# Altium PCB 4ch GRT reader v7.PCBDOC
Units mil, origin at the board's own origin, x right, y up, seen from the top; angles counter-clockwise.
Board outline 2650 x 4500 mil, 4 copper layers (Top Layer, InternalPlane1, InternalPlane2, Bottom Layer); 74 components, 102 nets, 369 pads, 10 vias.
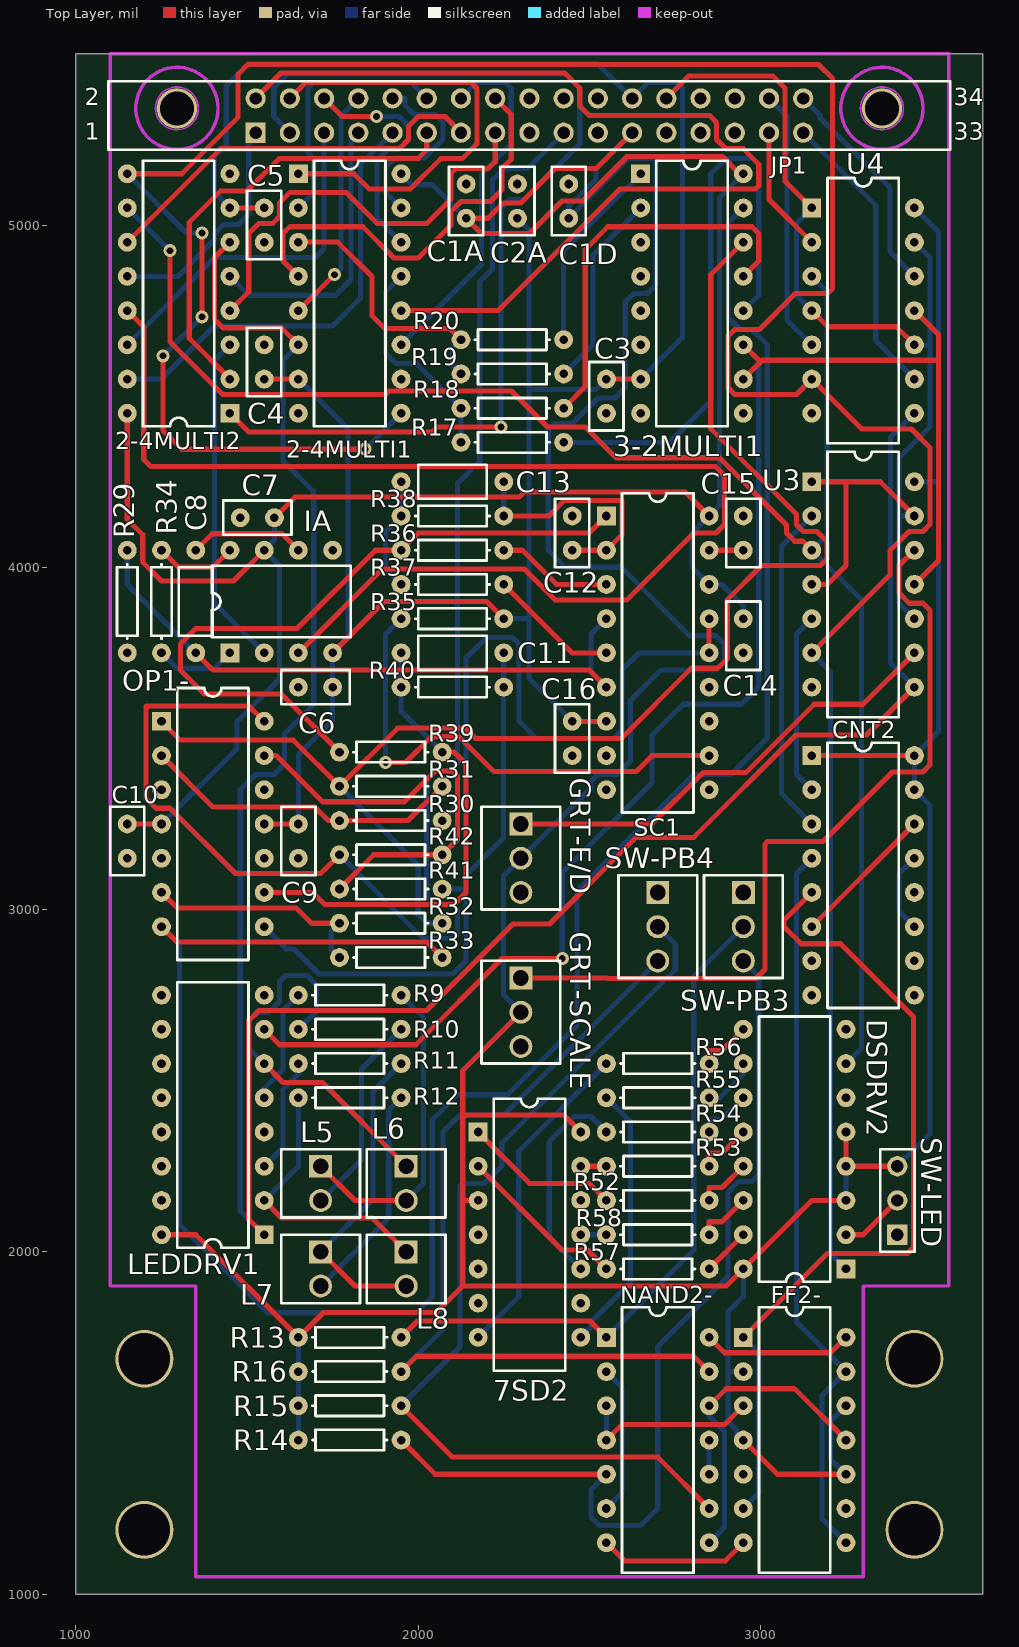
[diagram p0: Top Layer view]
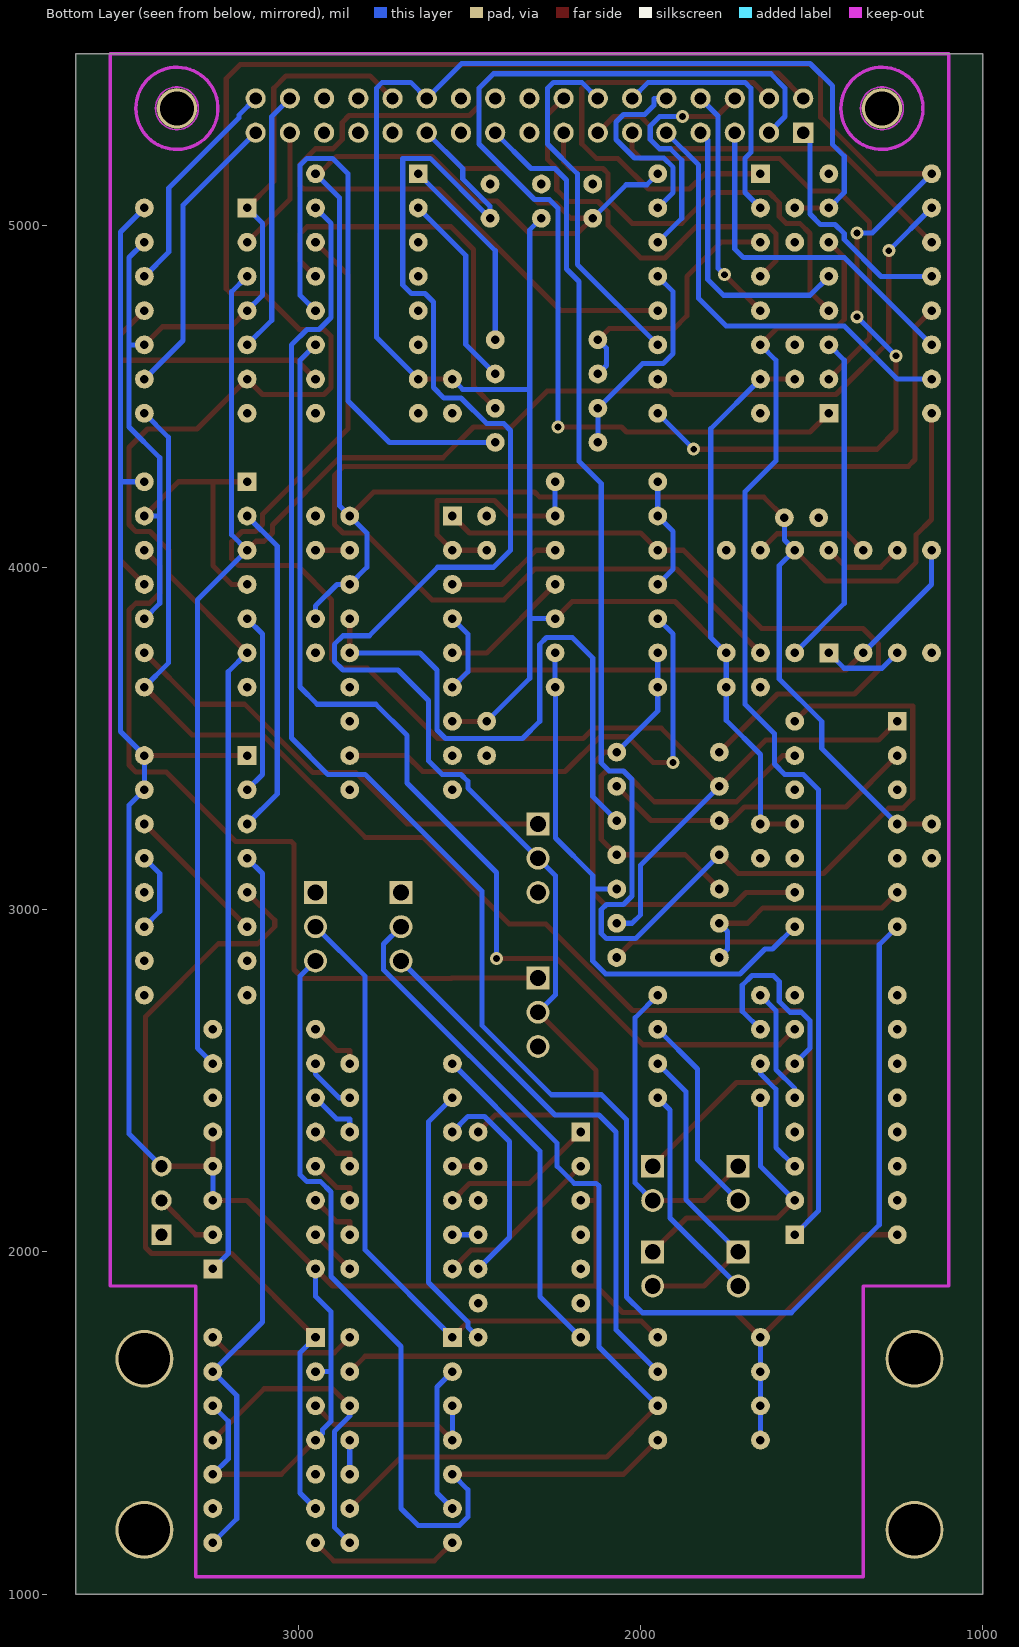
[diagram p1: Bottom Layer view, seen from below]
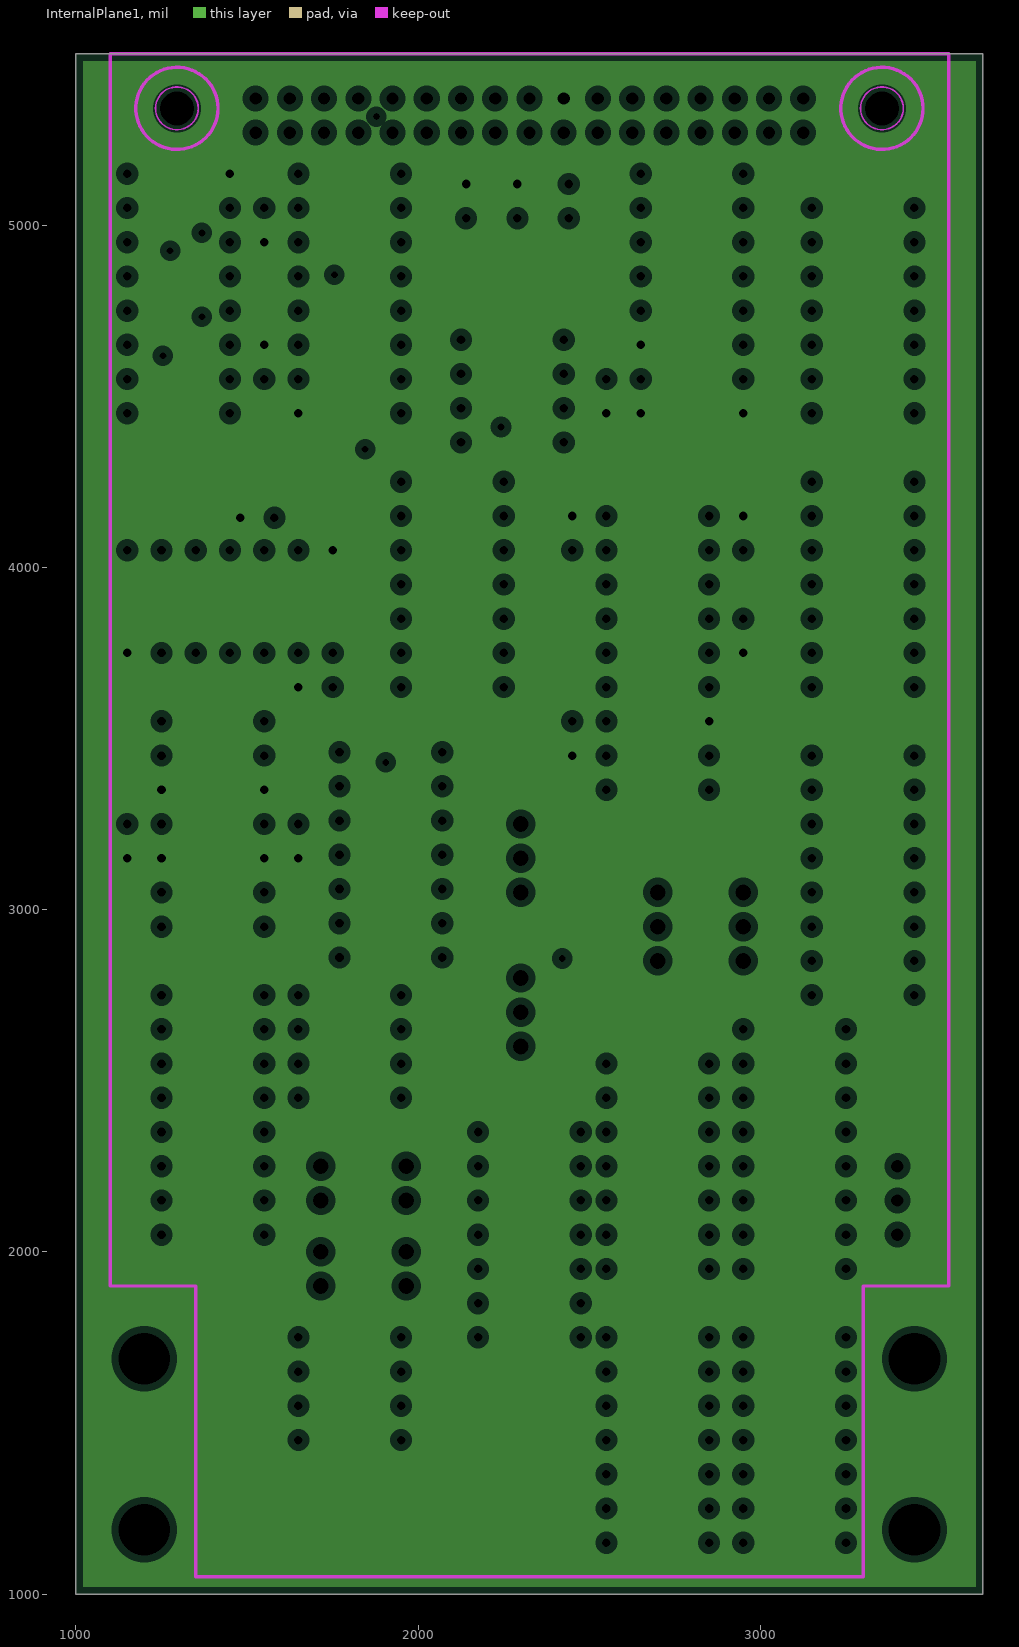
[diagram p2: InternalPlane1, clearances drawn from the general rule]
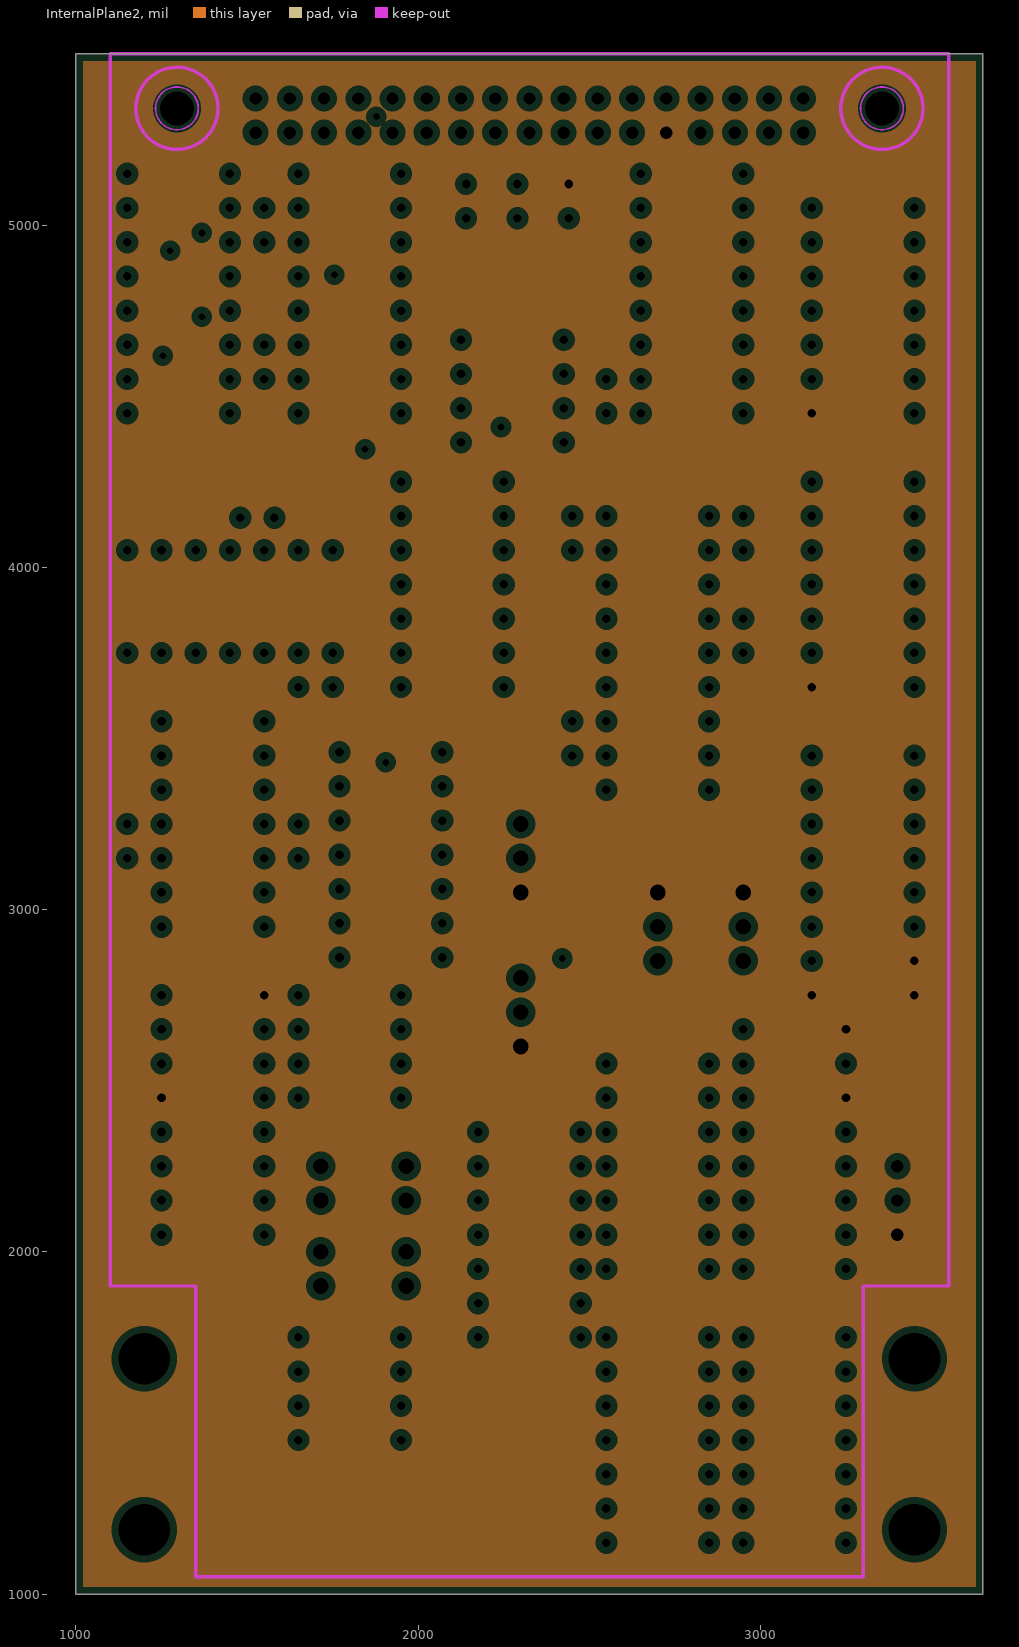
[diagram p3: InternalPlane2, clearances drawn from the general rule]

## Layer stack, top to bottom
Top Layer: signal copper 1.4
Dielectric: core 12.6, FR-4, Dk 4.8
InternalPlane1: plane copper 1.4, net AGD
Dielectric: prepreg 12.6, FR-4, Dk 4.8
InternalPlane2: plane copper 1.4, net DGD
Dielectric: core 12.6, FR-4, Dk 4.8
Bottom Layer: signal copper 1.4

## Board outline
1000,1000 1000,5500 3650,5500 3650,1000

## Design rules (kind name [scope] priority, off if disabled: settings)
Clearance [All] p1: gap=10
ComponentClearance [All] p1: gap=10 collisioncheckmode=0
HoleSize [All] p1: absolutevalues=TRUE maxlimit=200 minlimit=1 maxpercent=80.000 minpercent=20.000
PlaneClearance [All] p1: clearance=20
PlaneConnect [All] p1: planeconnectstyle=Relief reliefexpansion=20 reliefentries=4 reliefconductorwidth=10 reliefairgap=10
PolygonConnect [All] p1: connectstyle=Relief reliefconductorwidth=10 reliefentries=4 polygonreliefangle="90 Angle"
RoutingLayers [All] p1: top layer=Horizontal bottom layer=Vertical
RoutingVias [All] p1: holewidth=20 width=38 viastyle="Through Hole" minholewidth=20 minwidth=38 maxholewidth=20 maxwidth=38
SolderMaskExpansion [All] p1: expansion=4
TestPointUsage [All] p1: valid=0 allowmultiple=FALSE
Testpoint [All] p1: side=15 testpointundercomponent=TRUE minsize=40 maxsize=100 preferedsize=60 minholesize=0 maxholesize=40 preferedholesize=32 testpointgrid=1 style=1023 order=-539222988
Width [All] p1: maxlimit=30 minlimit=15 preferedwidth=10 toplayer_prefwidth=15 bottomlayer_prefwidth=15 minimp=50.000000 maximp=50.000000 favimp=50.000000
13 further rules are at their usual default settings.

## Components (designator, comment, footprint, x,y, rotation, side; value= is the part's Value field where it differs from the comment)
2-4MULTI1 "MC74HC4052N" DIP-16/X1.5 1800,4800 r270 top
2-4MULTI2 "MC74HC4052N" DIP-16/X1.5 1300,4800 r90 top
3-2MULTI1 "MC74HC4053N" DIP-16/X1.5 2800,4800 r270 top
7SD2 "LED-5082-7650" DIP-14 2325,2050 r270 top
C1A "1uF" RAD-0.1#1 2140,5120 r270 top (schematic designator C36)
C1D "Comment" RAD-0.1#1 2440,5020 r90 top
C2A "1uF" RAD-0.1#1 2290,5020 r90 top (schematic designator C37)
C3 ".1uF" RAD-0.1#1 2550,4550 r270 top (schematic designator C20)
C4 ".1uF" RAD-0.1#1 1550,4650 r270 top (schematic designator C28)
C5 ".1uF" RAD-0.1#1 1550,4950 r90 top (schematic designator C31)
C6 ".1uF" RAD-0.1#1 1750,3650 r180 top (schematic designator C34)
C7 ".1uF" RAD-0.1#1 1480,4145 r0 top (schematic designator C33)
C8 "33uF" RAD-0.1#2 1350,3850 r90 top
C9 ".1uF" RAD-0.1#1 1650,3150 r90 top (schematic designator C26)
C10 ".1uF" RAD-0.1#1 1150,3250 r270 top (schematic designator C25)
C11 "30uF" RAD-0.1#2 2050,3750 r0 top (schematic designator C4)
C12 "1uF" RAD-0.1#1 2450,4150 r270 top (schematic designator C2)
C13 ".47uF" RAD-0.1#2 2050,4250 r0 top (schematic designator C3)
C14 "in IC socket - GND to pin9" RAD-0.1#1 2950,3750 r90 top (schematic designator C1)
C15 ".1uF" RAD-0.1#1 2950,4150 r270 top (schematic designator C1)
C16 ".1uF" RAD-0.1#1 2450,3450 r90 top (schematic designator C23)
CNT2 "SN74193N" DIP-16/X1.5 3300,3100 r270 top
DSDRV2 "SN7447AN" DIP-16/X1.5 3100,2300 r90 top
FF2- "SN7474N" DIP-14/D19.7 3100,1450 r270 top
GRT-E/D "SW-SPDT" "Bulky Header 3" 2300,3250 r270 top
GRT-SCALE "SW-SPDT" "Bulky Header 3" 2300,2800 r270 top
IA "INA114AP" DIP-8 1600,3900 r0 top
JP1 "MHDR2X17" "Header 34 with Holes" 1525,5270 r0 top
L5 "LED2" BHDR1X2 1600,2300 r0 top
L6 "LED2" BHDR1X2 1850,2300 r0 top
L7 "LED2" BHDR1X2 1600,2050 r0 top
L8 "LED2" BHDR1X2 1850,2050 r0 top
LEDDRV1 "AM26LS31CN" DIP-16/X1.5 1400,2400 r90 top
NAND2- "SN7400N" DIP-14/D19.7 2700,1450 r270 top
OP1- "OP484EP" DIP-14 1400,3250 r270 top
R9 "100" AXIAL-0.3 1800,2750 r0 top
R10 "100" AXIAL-0.3 1800,2650 r180 top
R11 "100" AXIAL-0.3 1800,2550 r0 top
R12 "100" AXIAL-0.3 1800,2450 r180 top
R13 "10K" AXIAL-0.3 1800,1750 r180 top
R14 "10K" AXIAL-0.3 1800,1450 r0 top
R15 "10K" AXIAL-0.3 1800,1550 r180 top
R16 "10K" AXIAL-0.3 1800,1650 r0 top
R17 "1M" AXIAL-0.3 2275,4365 r180 top
R18 "100K" AXIAL-0.3 2275,4465 r180 top
R19 "1M" AXIAL-0.3 2275,4565 r180 top
R20 "100K" AXIAL-0.3 2275,4665 r180 top
R29 "5K" AXIAL-0.3 1150,3900 r270 top
R30 "1K" AXIAL-0.3 1920,3260 r180 top
R31 "750" AXIAL-0.3 1920,3360 r180 top
R32 "10K" AXIAL-0.3 1920,2960 r180 top
R33 "10K" AXIAL-0.3 1920,2860 r0 top
R34 "100" AXIAL-0.3 1250,3900 r270 top
R35 "47K" AXIAL-0.3 2100,3850 r0 top
R36 "10K" AXIAL-0.3 2100,4050 r180 top
R37 "1K" AXIAL-0.3 2100,3950 r180 top
R38 "4.7K" AXIAL-0.3 2100,4150 r0 top
R39 "10K" AXIAL-0.3 1920,3460 r180 top
R40 "50K" AXIAL-0.3 2100,3650 r180 top
R41 "10K" AXIAL-0.3 1920,3060 r0 top
R42 "10K" AXIAL-0.3 1920,3160 r0 top
R52 "1000" AXIAL-0.3 2700,2150 r180 top
R53 "1000" AXIAL-0.3 2700,2250 r180 top
R54 "1000" AXIAL-0.3 2700,2350 r180 top
R55 "1000" AXIAL-0.3 2700,2450 r180 top
R56 "1000" AXIAL-0.3 2700,2550 r180 top
R57 "1000" AXIAL-0.3 2700,1950 r180 top
R58 "1000" AXIAL-0.3 2700,2050 r180 top
SC1 "NE5521" DIP-18 2700,3750 r270 top
SW-LED "Comment" HDR1X3 3400,2050 r90 top
SW-PB3 "SW-SPDT" "Bulky Header 3" 2950,3050 r270 top
SW-PB4 "SW-SPDT" "Bulky Header 3" 2700,3050 r270 top
U3 "SN74LS125AN" DIP-14/D19.7 3300,3950 r270 top
U4 "SN74LS126AN" DIP-14/D19.7 3300,4750 r270 top

## Footprints (in the part's own frame and the unit in brackets; to place one, negate y for a bottom-side part, rotate by r counter-clockwise, add the part's x,y. Pads: shape width x height; smd on the part's side, far side on the other; paste and mask are expansions set on the pad)
AXIAL-0.3 [mil]
  round 55 hole 25: 1(-150,0) 2(150,0)
  silkscreen extent -109,-30 109,30
BHDR1X2 [mil] "Header, 2 Pin"
  rect 67x67 hole 46: 1(115,-50)
  round 67 hole 46: 2(115,-150)
  silkscreen extent 0,-200 230,0
"Bulky Header 3" [mil] "3-pin header, bulky"
  rect 67x67 hole 46: 1(0,0)
  round 67 hole 46: 2(100,0) 3(200,0)
  silkscreen extent -50,-115 250,115
DIP-8 [mil]
  rect 55x55 hole 25: 1(-150,-150)
  round 55 hole 25: 2(-50,-150) 3(50,-150) 4(150,-150) 5(150,150) 6(50,150) 7(-50,150) 8(-150,150)
  silkscreen extent -203,-104 203,104
DIP-14 [mil]
  rect 55x55 hole 25: 1(-300,-150)
  round 55 hole 25: 2(-200,-150) 3(-100,-150) 4(0,-150) 5(100,-150) 6(200,-150) 7(300,-150) 8(300,150) 9(200,150) 10(100,150) 11(0,150) 12(-100,150) 13(-200,150) 14(-300,150)
  silkscreen extent -398,-104 398,104
DIP-14/D19.7 [mil]
  rect 55x55 hole 25: 1(-300,-150)
  round 55 hole 25: 2(-200,-150) 3(-100,-150) 4(0,-150) 5(100,-150) 6(200,-150) 7(300,-150) 8(300,150) 9(200,150) 10(100,150) 11(0,150) 12(-100,150) 13(-200,150) 14(-300,150)
  silkscreen extent -388,-104 388,104
DIP-16/X1.5 [mil]
  rect 55x55 hole 25: 1(-350,-150)
  round 55 hole 25: 2(-250,-150) 3(-150,-150) 4(-50,-150) 5(50,-150) 6(150,-150) 7(250,-150) 8(350,-150) 9(350,150) 10(250,150) 11(150,150) 12(50,150) 13(-50,150) 14(-150,150) 15(-250,150) 16(-350,150)
  silkscreen extent -388,-104 388,104
DIP-18 [mil]
  rect 55x55 hole 25: 1(-400,-150)
  round 55 hole 25: 2(-300,-150) 3(-200,-150) 4(-100,-150) 5(0,-150) 6(100,-150) 7(200,-150) 8(300,-150) 9(400,-150) 10(400,150) 11(300,150) 12(200,150) 13(100,150) 14(0,150) 15(-100,150) 16(-200,150) 17(-300,150) 18(-400,150)
  silkscreen extent -467,-104 467,104
HDR1X3 [mil]
  rect 59x59 hole 36: 1(0,0)
  round 59 hole 36: 2(100,0) 3(200,0)
  silkscreen extent -50,-50 250,50
"Header 34 with Holes" [mil] "34-pin DIP header with holes"
  rect 59x59 hole 36: 1(0,0)
  round 59 hole 36: 2(0,100) 3(100,0) 4(100,100) 5(200,0) 6(200,100) 7(300,0) 8(300,100) 9(400,0) 10(400,100) 11(500,0) 12(500,100) 13(600,0) 14(600,100) 15(700,0) 16(700,100) 17(800,0) 18(800,100) 19(900,0) 20(900,100) 21(1000,0) 22(1000,100) 23(1100,0) 24(1100,100) 25(1200,0) 26(1200,100) 27(1300,0) 28(1300,100) 29(1400,0) 30(1400,100) 31(1500,0) 32(1500,100) 33(1600,0) 34(1600,100)
  round 118 hole 100: ""(-230,71) ""(1830,71)
  Keep-Out Layer circle w10: c1830,71 r120
  Keep-Out Layer circle w10: c-230,71 r120
  Keep-Out Layer circle w5: c1830,71 r62.5
  Keep-Out Layer circle w5: c-230,71 r62.5
  silkscreen extent -430,-50 2030,150
RAD-0.1#1 [mil]
  round 55 hole 25: 1(0,0) 2(100,0)
  silkscreen extent -50,-50 150,50
RAD-0.1#2 [mil]
  round 55 hole 25: 1(-100,0) 2(200,0)
  silkscreen extent -50,-50 150,50

## Part data
2-4MULTI1 2-4MULTI2: "Dual 4-Channel Analog Multiplexer/Demultiplexer"
3-2MULTI1: "Analog Multiplexer/Demultiplexer"
C1A C2A C3 C4 C5 C6 C7 C8 C9 C10 C11 C12 C13 C14 C15 C16: library part Cap, "Capacitor"
CNT2: "Synchronous 4-Bit Up/Down Counter (Dual Clock with Clear)"
DSDRV2: "BCD-to-Seven-Segment Decoder/Driver"
FF2-: "Dual D-Type Positive-Edge-Triggered Flip-Flop with Preset and Clear"
GRT-E/D GRT-SCALE SW-PB3 SW-PB4: "Single-Pole, Double-Throw Switch"
IA: "Precision Instrumentation Amplifier"
JP1: "Header, 17-Pin, Dual row"
L5 L6 L7 L8: "Typical RED, GREEN, YELLOW, AMBER GaAs LED"
LEDDRV1: "Quadruple Differential Line Driver"
NAND2-: "Quadruple 2-Input Positive-NAND Gate"
OP1-: "Precision Rail-to-Rail Input and Output Operational Amplifier"
R9 R10 R11 R12 R13 R14 R15 R16 R17 R18 R19 R20 R29 R30 R31 R32 R33 R34 R35 R36 R37 R38 R39 R40 R41 R42 R52 R53 R54 R55 R56 R57 R58: library part Res1, "Resistor"
U3 U4: "Quadruple Bus Buffer with 3-State Outputs"

## Free pads (board coordinates)
  round 169 hole 151: 1(1200,1187.5) 2(1200,1687.5) 3(3450,1187.5) 4(3450,1687.5)

## Via types
v1: diameter 38, hole 20, Top Layer to Bottom Layer, 10 vias

## Nets (pads, with @x,y where several pads share a name; then routed paths per layer and width w, separated by ;. In a path a pad name is that pad's centre, name@x,y a point inside that pad or via, vN(x,y) a via of type N, cw(c..) or ccw(c..) an arc to the next point about the centre after c; other vN are vias at no path point)
+5AV: 2-4MULTI1.16 2-4MULTI2.16 3-2MULTI1.16 C1A.2 C7.2 C10.1 C14.2 IA.7 JP1.23 OP1-.4 SC1.16 SC1.18 | length 6578.1
  Top Layer w15: C10.1 OP1-.4 ; 2-4MULTI2.16 1150,4140 1195,4095 1195,4015 1250,3960 1460,3960 IA.7 ; C7.2 1640,4205 2295,4205 2310,4220 2780,4220 SC1.18 ; JP1.23 2520,5165 2400,5165 2300,5065 2249,5065 2204,5020 C1A.2 2185,4975 2325,4975 2420,5070 2480,5070 2610,5200 2889.2,5200 3-2MULTI1.16@2939.2,5150
  Bottom Layer w15: OP1-.4 1471,3471 1471,3550 1595,3674 1595,4005 IA.7 1580,4080 C7.2 ; 2-4MULTI1.16 1982,5118 2042,5118 C1A.2 ; C14.2 2950,3887.5 2887.5,3950 SC1.16 2800,4000 2800,4100 SC1.18 2880,4180 2880,5080 3-2MULTI1.16
+5DV: 7SD2.3 7SD2.14 C1D.1 CNT2.1 CNT2.15 CNT2.16 DSDRV2.3 DSDRV2.4 DSDRV2.5 DSDRV2.16 FF2-.2 FF2-.4 FF2-.10 FF2-.12 GRT-E/D.2 GRT-SCALE.2 LEDDRV1.16 R13.2 R14.1 R15.2 R16.1 SW-LED.3 U3.14 U4.14 | length 12802.9
  Top Layer w15: LEDDRV1.16 1350,2050 R13.2 1723,1823 2053,1823 2130,1900 ; 2130,2150 7SD2.3 ; 2130,2390 2140,2400 2425,2400 7SD2.14 ; GRT-SCALE.2 2130,2530 2130,1900 ; FF2-.4 3050,1350 FF2-.10 ; CNT2.1 CNT2.16 ; DSDRV2.3 3150,2150 DSDRV2.16 2900,1900 2130,1900 ; DSDRV2.5 DSDRV2.4 SW-LED.3
  Bottom Layer w15: R14.1 R15.2 R16.1 R13.2 ; GRT-SCALE.2 2249,2751 2249,3099 GRT-E/D.2 2505,3355 2505,3375 2525,3395 2580,3395 2620,3435 2620,3611 2709,3700 2870,3700 2895,3725 2895,3775 2870,3800 2793,3800 2593,4000 2430,4000 2380,4050 2380,4400 2400,4420 2450,4420 2525,4495 2575,4495 2605,4525 2605,4775 2630,4800 2670,4800 2695,4825 2695,5195 2615,5195 C1D.1 2440,5055 2520,5135 2520,5165 2625,5270 ; FF2-.4 2930,1470 2930,1480 2905,1505 2905,1650 ; FF2-.2 2905,1650 ; DSDRV2.16 2950,1870 2905,1825 2905,1650 ; FF2-.10 3205,1395 3205,1505 FF2-.12 ; DSDRV2.3 DSDRV2.4 ; SW-LED.3 3495,2345 3495,3305 CNT2.15 CNT2.16 3520,3520 3520,4250 ; U3.14 3520,4250 ; U4.14 3520,4980 3520,4250
-5V: 2-4MULTI1.7 2-4MULTI2.7 3-2MULTI1.7 C2A.1 C3.1 C4.2 C5.2 C6.1 C9.2 C16.2 IA.4 JP1.24 OP1-.11 R35.2 SC1.7 | length 7070
  Top Layer w15: 2-4MULTI2.7 C5.2 ; OP1-.11 C9.2 ; C4.2 2-4MULTI1.7 ; IA.4 1900,3900 2200,3900 R35.2 ; C16.2 SC1.7 ; C3.1 3-2MULTI1.7
  Bottom Layer w15: 2-4MULTI2.7 1405,5095 1405,5201 1439,5235 1439,5406 1505,5472 2523,5472 JP1.24 2672,5417 2755,5417 2772,5400 2772,4672 3-2MULTI1.7 ; C9.2 1650,3453 1750,3553 C6.1 IA.4 1795,3795 1795,4405 2-4MULTI1.7 ; R35.2 2324,3850 ; C2A.1 2324,4986 2324,4520 ; C16.2 2324,3676 2324,3850 ; C3.1 2520,4520 2324,4520 ; 2324,3850 2324,4520
AGD: 2-4MULTI1.8 2-4MULTI2.8 3-2MULTI1.6 3-2MULTI1.8 3-2MULTI1.9 C1A.1 C2A.2 C3.2 C4.1 C5.1 C6.2 C7.1 C9.1 C10.2 C12.1 C14.1 C15.1 C16.1 IA.5 JP1.20 OP1-.3 OP1-.5 OP1-.10 OP1-.12 R29.2 SC1.12
DGD: C1D.2 CNT2.8 CNT2.9 CNT2.10 DSDRV2.6 DSDRV2.8 GRT-E/D.3 GRT-SCALE.3 JP1.25 LEDDRV1.8 LEDDRV1.12 SW-LED.1 SW-PB3.1 SW-PB4.1 U3.7 U4.7
DIO0: JP1.31 U4.2 | length 371.8
  Top Layer w15: JP1.31 3025,5075 U4.2
DIO1: JP1.32 U4.5 | length 771.8
  Bottom Layer w15: JP1.32 3078,5317 3078,4722 U4.5
DIO2: JP1.33 U4.9 | length 854.6
  Bottom Layer w15: JP1.33 3337,5058 3337,4663 U4.9
DIO3: JP1.34 U4.12 | length 654.6
  Bottom Layer w15: JP1.34 3174,5321 3174,5313 3379,5108 3379,4921 U4.12
GND: FF2-.7 NAND2-.7 | length 443.9
  Top Layer w15: NAND2-.7 2603,1097 2897,1097 FF2-.7
"GRT OUT": JP1.19 OP1-.14 R42.1 | length 4403.1
  Top Layer w15: OP1-.14 1505,3595 1205,3595 1205,3325 1234,3296 1275,3296 1466,3105 1715,3105 R42.1
  Bottom Layer w15: R42.1 2015,2915 2100,2915 2115,2930 2115,3000 2100,3015 2050,3015 2025,3040 2025,3380 2050,3405 2092,3405 2115,3428 2115,4245 2180,4310 2180,4835 2217,4872 2217,5132 2250,5165 2320,5165 JP1.19
"L/R LINE": JP1.26 U3.1 U3.4 U3.10 U3.13 U4.1 U4.4 U4.10 U4.13 | length 3424
  Top Layer w15: JP1.26 2791,5436 3036,5436 3072,5400 3072,5128 U4.1 ; U3.4 3195,3950 3250,4005 3250,4250 ; U3.1 3250,4250 ; U4.4 3197,4703 3397,4703 U4.10 ; U3.13 3350,4250 3250,4250
  Bottom Layer w15: U4.4 3105,4795 3105,5005 U4.1 ; U3.10 3405,3895 3405,4150 ; U3.13 3405,4150 ; U4.10 3495,4650 ; U4.13 3495,4905 3495,4650 ; 3405,4150 3405,4320 3495,4410 3495,4650
Net2-4MULTI1_1: 2-4MULTI1.1 JP1.4 | length 1330.9
  Top Layer w15: JP1.4 1672,5417 2154,5417 2172,5399 2172,5237.5 2128.5,5194 2066,5194 1977,5105 1857,5105 1812,5150 2-4MULTI1.1
Net2-4MULTI1_2: 2-4MULTI1.2 JP1.12 | length 749.2
  Bottom Layer w15: 2-4MULTI1.2 1695,5095 1695,5195 1678,5212 1678,5400 1695,5417 1978,5417 JP1.12
Net2-4MULTI1_3: 2-4MULTI1.3 R19.2 R20.2 | length 781.1
  Top Layer w15: 2-4MULTI1.3 1765,4950 1865,4850 1865,4735 1902,4698 2092,4698 R20.2
  Bottom Layer w15: R19.2 2100,4590 2100,4640 R20.2
Net2-4MULTI1_4: 2-4MULTI1.4 JP1.16 | length 1233.1
  Top Layer w15: 2-4MULTI1.4 1605,4895 1605,4975 1625,4995 1838,4995 1929,4904 2000,4904 2095,4999 2095,5039 2125,5069 2211,5069 2245,5103 2245,5165 2272,5192 2272,5323 JP1.16
Net2-4MULTI1_5: 2-4MULTI1.5 JP1.8 | length 692.5
  Top Layer w15: 2-4MULTI1.5 v1(1755,4855)
  Bottom Layer w15: v1(1755,4855) 1774,4874 1774,5319 JP1.8
Net2-4MULTI1_6: 2-4MULTI1.6 2-4MULTI2.6 LEDDRV1.1 U3.8 U4.8 | length 7175.8
  Top Layer w15: 2-4MULTI2.6 1405,4905 1405,4725 1430,4700 1600,4700 2-4MULTI1.6 ; LEDDRV1.1 1505,2095 1505,2675 1535,2705 2024,2705 2277,2958 2384,2958 2637,3211 2805,3211 3104,3510 3310,3510 U3.8
  Bottom Layer w15: LEDDRV1.1 1480,2120 1480,3350 1525,3395 1579,3395 1609,3425 1609,3514 1695,3600 1695,4221 1605,4311 1605,4605 2-4MULTI1.6 ; U3.8 3380,3720 3380,4380 U4.8
Net2-4MULTI1_9: 2-4MULTI1.9 2-4MULTI2.9 DSDRV2.1 U3.6 U4.6 | length 8395.8
  Top Layer w15: 2-4MULTI2.9 1309,5150 1474,5315 1474,5441 1502,5469 3170,5469 3211,5428 3211,4814 3197,4800 3102,4800 2997,4695 2925,4695 2905,4675 2905,4525 2925,4505 3105,4505 U4.6 3296,4404 3441,4404 3495,4350 3495,4125 3475,4105 3434,4105 3379,4050 3379,3979 U3.6 ; v1(1254,4618) 1254,4400 1309,4345 v1(1845,4345) ; v1(1368,4732) v1(1368,4977)
  Bottom Layer w15: 2-4MULTI2.9 1323,4977 v1(1368,4977) ; v1(1254,4618) v1(1368,4732) ; v1(1845,4345) 2-4MULTI1.9 ; U3.6 3205,3695 3205,1995 DSDRV2.1
Net2-4MULTI1_10: 2-4MULTI1.10 2-4MULTI2.10 DSDRV2.7 U3.3 U4.3 | length 5043.4
  Top Layer w15: v1(1275,4925) 1275,4659 1429,4505 1905,4505 1915,4515 1950,4515 ; 2-4MULTI1.10 1950,4515 ; U3.3 3124,4076 3100,4076 3076,4100 3076,4124 2880,4320 2578,4320 2488,4410 2378,4410 2273,4515 1950,4515
  Bottom Layer w15: 2-4MULTI2.10 v1(1275,4925) ; U4.3 3195,4805 3195,4095 U3.3 3295,3905 3295,2595 DSDRV2.7
Net2-4MULTI1_11: 2-4MULTI1.11 JP1.14 | length 1056.9
  Bottom Layer w15: 2-4MULTI1.11 2185,4885 2185,5150 2272,5237 2272,5400 2255,5417 2172,5417 JP1.14
Net2-4MULTI1_12: 2-4MULTI1.12 JP1.2 | length 2929.8
  Top Layer w15: JP1.2 1599,5444 2428,5444 2472,5400 2472,5348 2500,5320 2852,5320 2872,5300 2872,5250 2899,5223 2950,5223 2995,5178 2995,5115 2985,5105 2589,5105 2234,4750 2-4MULTI1.12
Net2-4MULTI1_13: 2-4MULTI1.13 R17.2 R18.2 | length 629.9
  Bottom Layer w15: 2-4MULTI1.13 1905,4805 1905,4625 1935,4595 1995,4595 R18.2 R17.2
Net2-4MULTI1_14: 2-4MULTI1.14 JP1.6 | length 705.5
  Top Layer w15: JP1.6 1778,5317 v1(1878,5317)
  Bottom Layer w15: v1(1878,5317) 1944.47,5317 1972,5289.47 1972,5250 1945,5223 1913.36,5223 1880,5189.64 1880,5020 2-4MULTI1.14
Net2-4MULTI1_15: 2-4MULTI1.15 JP1.10 | length 576.3
  Bottom Layer w15: JP1.10 1961,5370 1961,5350 1988,5323 2050,5323 2072,5301 2072,5250 2018,5196 1932.36,5196 1905,5168.64 1905,5095 2-4MULTI1.15
Net2-4MULTI2_1: 2-4MULTI2.1 JP1.3 | length 3009.7
  Top Layer w15: 2-4MULTI2.1 1505,4395 2041,4395 2056,4410 v1(2242,4410)
  Bottom Layer w15: JP1.3 1578,5317 1578,5400 1620,5442 2430,5442 2472,5400 2472,5237 2310,5075 2267,5075 2242,5050 v1(2242,4410)
Net2-4MULTI2_2: 2-4MULTI2.2 JP1.11 | length 1339.1
  Top Layer w15: 2-4MULTI2.2 1331,4669 1331,5008 1423,5100 1500,5100 1595,5195 2000,5195 2025,5220 JP1.11
Net2-4MULTI2_3: 2-4MULTI2.3 IA.2 | length 978.7
  Bottom Layer w15: 2-4MULTI2.3 1405,4605 1405,3895 IA.2
Net2-4MULTI2_4: 2-4MULTI2.4 JP1.15 | length 1282.1
  Top Layer w15: 2-4MULTI2.4 1505,4805 1505,4975 1535,5005 1575,5005 1595,5025 1595,5065 1625,5095 1790,5095 1880,5005 2025.64,5005 2095,5074.36 2095,5150 2110,5165 2205,5165 2225,5185 JP1.15
Net2-4MULTI2_5: 2-4MULTI2.5 JP1.7 | length 833.5
  Bottom Layer w15: 2-4MULTI2.5 1505,4795 1758,4795 1804,4841 1804,5249 JP1.7
Net2-4MULTI2_11: 2-4MULTI2.11 JP1.13 | length 1169.3
  Top Layer w15: 2-4MULTI2.11 1423,5223 1945,5223 1972,5250 1972,5289 2000,5317 2078,5317 JP1.13
Net2-4MULTI2_12: 2-4MULTI2.12 JP1.1 | length 686.9
  Bottom Layer w15: 2-4MULTI2.12 1297.5,4850 1405,4957.5 1405,4975 1432,5002 1475,5002 1505,5032 1505,5250 JP1.1
Net2-4MULTI2_13: 2-4MULTI2.13 IA.3 | length 3789.2
  Top Layer w15: 2-4MULTI2.13 1198,4702 1198,4315 1218,4295 2868,4295 2895,4268 2895,4125 2870,4100 2805,4100 2610,3905 2400,3905 2310,3995 1895,3995 IA.3
Net2-4MULTI2_14: 2-4MULTI2.14 JP1.5 | length 1031
  Bottom Layer w15: 2-4MULTI2.14 1405,4905 1700,4905 1725,4930 JP1.5
Net2-4MULTI2_15: 2-4MULTI2.15 JP1.9 | length 1301.7
  Bottom Layer w15: 2-4MULTI2.15 1250,4550 1405,4705 1750,4705 1831,4786 1831,5176 JP1.9
Net3-2MULTI1_1: 3-2MULTI1.1 R20.1 | length 578.2
  Bottom Layer w15: R20.1 2425,4925 3-2MULTI1.1
Net3-2MULTI1_2: 3-2MULTI1.2 R19.1 | length 578.2
  Bottom Layer w15: R19.1 2511,4651 2511,4911 3-2MULTI1.2
Net3-2MULTI1_10: 3-2MULTI1.10 3-2MULTI1.11 LEDDRV1.7 U3.11 U4.11 | length 4665.1
  Top Layer w15: LEDDRV1.7 1595,2605 1993,2605 2245,2857 v1(2421,2857) ; 3-2MULTI1.10 3000,4600 ; 3-2MULTI1.11 3000,4600 ; U3.11 3520,4020 3520,4605 ; U4.11 3520,4680 3520,4605 ; 3000,4600 3005,4605 3520,4605
  Bottom Layer w15: v1(2421,2857) 2421,3108 2683,3370 2683,3509 2774,3600 2945,3600 2995,3650 2995,4605 3-2MULTI1.11
Net3-2MULTI1_12: 3-2MULTI1.12 R17.1 | length 1754.7
  Bottom Layer w15: R17.1 2734,4365 2855,4486 2855,5150 2900,5195 2975,5195 2995,5175 2995,4795 3-2MULTI1.12
Net3-2MULTI1_13: 3-2MULTI1.13 R18.1 | length 1176.4
  Top Layer w15: R18.1 2488,4528 2488,4929 2554,4995 2975,4995 2995,4975 2995,4895 3-2MULTI1.13
Net3-2MULTI1_14: 3-2MULTI1.14 OP1-.1 R31.2 R32.1 | length 4104
  Top Layer w15: OP1-.1 1305,3495 1635,3495 R31.2 1940,3530 2138,3530 2168,3500 2593,3500 2798,3705 2875,3705 2903,3733 2903,3905 3003,4005 3175,4005 3195,4025 3195,4075 3165,4105 3125,4105 3105,4125 3105,4155 2855,4405 2855,4855 3-2MULTI1.14
  Bottom Layer w15: R31.2 2000,3130 2000,2985 2025,2960 R32.1
Net3-2MULTI1_15: 3-2MULTI1.15 OP1-.7 R33.2 | length 6438
  Top Layer w15: OP1-.7 1295,2905 2025,2905 R33.2
  Bottom Layer w15: OP1-.7 1303,2897 1303,2079 1560,1822 1995,1822 2041,1868 2041,2386 2114,2459 2261,2459 2464,2662 2464,3054 2805,3395 2914,3395 3020,3501 3020,4650 2975,4695 2940,4695 2905,4730 2905,5005 3-2MULTI1.15
Net7SD2_1: 7SD2.1 R52.2 | length 457.8
  Top Layer w15: 7SD2.1 2325,2200 2500,2200 R52.2
Net7SD2_2: 7SD2.2 R57.2 | length 499.3
  Top Layer w15: 7SD2.2 2420,2005 2495,2005 R57.2
Net7SD2_7: 7SD2.7 R56.2 | length 955.3
  Bottom Layer w15: 7SD2.7 2294,1869 2294,2294 R56.2
Net7SD2_8: 7SD2.8 R55.2 | length 789.1
  Bottom Layer w15: 7SD2.8 2505,1780 2505,1795 2620,1910 2620,2380 R55.2
Net7SD2_10: 7SD2.10 R54.2 | length 626
  Bottom Layer w15: 7SD2.10 2383,2042 2383,2322 2456,2395 2505,2395 R54.2
Net7SD2_11: 7SD2.11 R58.2 | length 75
  Bottom Layer w15: 7SD2.11 R58.2
Net7SD2_13: 7SD2.13 R53.2 | length 75
  Top Layer w15: 7SD2.13 R53.2
NetC5_2: 
NetC7_2: 
NetC8_1: C8.1 R29.1 SC1.4 SC1.6 | length 1861.5
  Top Layer w15: C8.1 1400,3700 2500,3700 SC1.6
  Bottom Layer w15: R29.1 1150,3950 C8.1 ; SC1.6 2505,3695 2505,3805 SC1.4
NetC8_2: C8.2 IA.6 | length 339.8
  Top Layer w15: C8.2 1398,4098 1602,4098 IA.6
NetC11_1: C11.1 OP1-.9 R39.1 R40.2 | length 1418.2
  Top Layer w15: OP1-.9 1692,3050 1727,3015 2105,3015 2140,3050 2140,3425 2105,3460 R39.1
  Bottom Layer w15: C11.1 R40.2 1950,3580 R39.1
NetC11_2: C11.2 OP1-.8 R40.1 R41.2 | length 1678.5
  Bottom Layer w15: OP1-.8 1615,2885 1636.87,2885 1709.87,2812 2102,2812 2140,2850 2140,3060 ; R41.2 2140,3060 ; C11.2 R40.1 2249,3649 2249,3209 2140,3100 2140,3060
NetC12_2: C12.2 C13.2 R38.2 SC1.2 | length 727.3
  Top Layer w15: R38.2 2382,4150 2427,4195 2595,4195 2595,4095 SC1.2 C12.2
  Bottom Layer w15: R38.2 C13.2
NetC13_1: C13.1 R37.2 R38.1 | length 337.3
  Bottom Layer w15: R37.2 1905,3995 1905,4105 R38.1 C13.1
NetC15_2: C15.2 SC1.17 | length 100
  Top Layer w15: SC1.17 C15.2
NetCNT2_2: CNT2.2 U3.5 | length 537.3
  Bottom Layer w15: CNT2.2 3105,3395 3105,3805 U3.5
NetCNT2_3: CNT2.3 U3.2 | length 972.9
  Bottom Layer w15: CNT2.3 3062,3338 3062,4062 U3.2
NetCNT2_4: CNT2.4 FF2-.8 FF2-.13 | length 2136.7
  Bottom Layer w15: CNT2.4 3105,3105 3105,1795 FF2-.13 3180,1580 3180,1220 FF2-.8
NetCNT2_5: CNT2.5 FF2-.1 FF2-.6 | length 2438
  Top Layer w15: FF2-.1 3195,1995 3429.5,1995 3447,2012.5 3447,2687 3234,2900 3119,2900 3069,2950 3069,2969 CNT2.5
  Bottom Layer w15: FF2-.6 2995,1295 2995,1705 FF2-.1
NetCNT2_6: CNT2.6 CNT2.14 | length 424.3
  Top Layer w15: CNT2.6 CNT2.14
NetCNT2_11: CNT2.11 CNT2.13 | length 237.3
  Bottom Layer w15: CNT2.11 3405,2995 3405,3105 CNT2.13
NetDSDRV2_9: DSDRV2.9 R56.1 | length 163.7
  Top Layer w15: R56.1 2850,2588 2888,2588 DSDRV2.9
NetDSDRV2_10: DSDRV2.10 R55.1 | length 159.6
  Bottom Layer w15: R55.1 2881,2450 2950,2519 DSDRV2.10
NetDSDRV2_11: DSDRV2.11 R54.1 | length 163.7
  Bottom Layer w15: R54.1 2850,2388 2888,2388 DSDRV2.11
NetDSDRV2_12: DSDRV2.12 R53.1 | length 163.7
  Top Layer w15: R53.1 2850,2288 2888,2288 DSDRV2.12
NetDSDRV2_13: DSDRV2.13 R52.1 | length 163.7
  Top Layer w15: R52.1 2850,2188 2888,2188 DSDRV2.13
NetDSDRV2_14: DSDRV2.14 R58.1 | length 163.7
  Top Layer w15: R58.1 2850,2088 2888,2088 DSDRV2.14
NetDSDRV2_15: DSDRV2.15 R57.1 | length 141.4
  Top Layer w15: R57.1 DSDRV2.15
NetFF2-_3: FF2-.3 NAND2-.3 NAND2-.4 | length 541.4
  Top Layer w15: NAND2-.4 2595,1495 2895,1495 FF2-.3
  Bottom Layer w15: NAND2-.4 NAND2-.3
NetFF2-_11: FF2-.11 NAND2-.8 NAND2-.12 | length 920.1
  Top Layer w15: NAND2-.12 2900,1600 3100,1600 FF2-.11
  Bottom Layer w15: NAND2-.8 2895,1195 2895,1475 2850,1520 NAND2-.12
NetGRT-E/D_1: GRT-E/D.1 U3.9 | length 1357.1
  Top Layer w15: GRT-E/D.1 2682,3250 2832,3400 2957,3400 3157,3600 3300,3600 U3.9
NetGRT-SCALE_1: GRT-SCALE.1 U3.12 | length 2375.2
  Top Layer w15: GRT-SCALE.1 2552,2800 2553,2799 2987,2799 3013,2825 3013,3191 3021,3199 3183,3199 3386,3402 3475,3402 3495,3422 3495,3875 3475,3895 3435,3895 3405,3925 3405,4005 U3.12
NetIA_1: IA.1 R34.2 | length 237.3
  Bottom Layer w15: R34.2 1295,3705 1405,3705 IA.1
NetIA_8: IA.8 R34.1 | length 241.4
  Top Layer w15: R34.1 1300,4000 1400,4000 IA.8
NetL5_1: L5.1 L6.2 R9.2 | length 939.9
  Top Layer w15: L5.1 1815,2150 L6.2
  Bottom Layer w15: R9.2 2016,2684 2016,2201 L6.2
NetL5_2: L5.2 R10.1 | length 597.3
  Bottom Layer w15: L5.2 1834,2269 1834,2534 R10.1
NetL6_1: L6.1 LEDDRV1.6 R10.2 | length 1132.2
  Top Layer w15: LEDDRV1.6 1605,2495 1720,2495 L6.1
  Bottom Layer w15: LEDDRV1.6 1505,2595 1505,2675 1530,2700 1563.64,2700 1595,2731.36 1595,2789.5 1612.5,2807 1675,2807 1703,2779 1703,2703 R10.2
NetL7_1: L7.1 L8.2 R11.2 | length 938.8
  Top Layer w15: L7.1 1815,1900 L8.2
  Bottom Layer w15: L7.1 1868,2153 1868,2468 R11.2
NetL7_2: L7.2 R12.1 | length 647.3
  Bottom Layer w15: L7.2 1914,2099 1914,2414 R12.1
NetL8_1: L8.1 LEDDRV1.2 R12.2 | length 818.6
  Top Layer w15: LEDDRV1.2 1601,2099 1866,2099 L8.1
  Bottom Layer w15: LEDDRV1.2 1650,2250 R12.2
NetLEDDRV1_3: LEDDRV1.3 R11.1 | length 341.4
  Bottom Layer w15: LEDDRV1.3 1605,2305 1605,2475 1650,2520 R11.1
NetLEDDRV1_5: LEDDRV1.5 R9.1 | length 341.4
  Bottom Layer w15: LEDDRV1.5 1550,2478 1605,2533 1605,2705 R9.1
NetNAND2-_1: NAND2-.1 R13.1 SW-PB3.2 | length 2005.4
  Top Layer w15: R13.1 1998,1798 2502,1798 NAND2-.1
  Bottom Layer w15: NAND2-.1 2805,2005 2805,2805 SW-PB3.2
NetNAND2-_2: NAND2-.2 NAND2-.6 | length 437.3
  Bottom Layer w15: NAND2-.6 2595,1295 2595,1605 NAND2-.2
NetNAND2-_5: NAND2-.5 R14.2 SW-PB3.3 | length 2775.4
  Top Layer w15: R14.2 2050,1350 NAND2-.5
  Bottom Layer w15: NAND2-.5 2505,1305 2505,1225 2530,1200 2650,1200 2700,1250 2700,1723 2905,1928 2905,2175 2935,2205 2975,2205 2995,2225 2995,2805 SW-PB3.3
NetNAND2-_9: NAND2-.9 R15.1 SW-PB4.2 | length 2814.7
  Top Layer w15: R15.1 2100,1400 2700,1400 NAND2-.9
  Bottom Layer w15: R15.1 2122,1722 2122,2192 2130,2200 2194,2200 2244,2250 2244,2317 2751,2824 2751,2899 SW-PB4.2
NetNAND2-_10: NAND2-.10 NAND2-.11 | length 100
  Bottom Layer w15: NAND2-.10 NAND2-.11
NetNAND2-_13: NAND2-.13 R16.2 SW-PB4.3 | length 2522.9
  Top Layer w15: R16.2 1995,1695 2805,1695 NAND2-.13
  Bottom Layer w15: R16.2 2072,1772 2072,2350 2122,2400 2250,2400 SW-PB4.3
NetOP1-_2: OP1-.2 R30.2 R31.1 | length 940.1
  Top Layer w15: OP1-.2 1400,3300 1697,3300 1737,3260 R30.2 1970,3260 R31.1
NetOP1-_6: OP1-.6 R32.2 R33.1 | length 677.2
  Top Layer w15: OP1-.6 1295,3005 1643,3005 1688,2960 R32.2
  Bottom Layer w15: R33.1 1746,2884 1746,2936 R32.2
NetOP1-_13: OP1-.13 R41.1 R42.2 | length 1254.5
  Top Layer w15: OP1-.13 1585,3450 1720,3315 1960,3315 2050,3405 2100,3405 2115,3390 2115,3205 R42.2 1870,3160 R41.1
NetR30_1: R30.1 SC1.14 SC1.15 | length 1798.9
  Top Layer w15: SC1.14 SC1.15
  Bottom Layer w15: R30.1 2140,3330 2140,3735 2200,3795 2275,3795 2295,3775 2295,3550 2345,3500 2570,3500 2595,3525 2595,3700 2645,3750 SC1.14
NetR35_1: R35.1 SC1.11 | length 1476.4
  Top Layer w15: v1(1905,3430) 1963,3430 2038,3505 2119,3505 2221,3403 2637,3403 2684,3450 SC1.11
  Bottom Layer w15: v1(1905,3430) 1905,3805 R35.1
NetR36_1: R36.1 SC1.3 | length 341.4
  Top Layer w15: R36.1 2305,4050 2405,3950 SC1.3
NetR36_2: R36.2 R39.2 SC1.1 | length 2040.3
  Top Layer w15: R39.2 1600,3630 1375,3630 1305,3700 1305,3776 1350,3821 1646,3821 1875,4050 R36.2 2000,4100 2500,4100 SC1.1
NetR37_1: R37.1 SC1.5 | length 382.8
  Top Layer w15: R37.1 2450,3750 SC1.5
SW-LED: DSDRV2.2 SW-LED.2 | length 191.4
  Top Layer w15: DSDRV2.2 3300,2050 SW-LED.2
VCC: FF2-.14 NAND2-.14 | length 437.3
  Top Layer w15: NAND2-.14 2895,1705 3205,1705 FF2-.14
VCC: 
pads on no net: 3-2MULTI1.3 3-2MULTI1.4 3-2MULTI1.5 7SD2.4 7SD2.5 7SD2.6 7SD2.9 7SD2.12 CNT2.7 CNT2.12 FF2-.5 FF2-.9 JP1. JP1.17 JP1.18 JP1.21 JP1.22 JP1.27 JP1.28 JP1.29 JP1.30 LEDDRV1.4 LEDDRV1.9 LEDDRV1.10 LEDDRV1.11 LEDDRV1.13 LEDDRV1.14 LEDDRV1.15 SC1.8 SC1.9 SC1.10 SC1.13

## Polygon pours and split planes (outlines as drawn)
AGD on InternalPlane1 (split plane): 1020.01,1020.01 1020.01,5479.98 3629.99,5479.98 3629.99,1020.01
DGD on InternalPlane2 (split plane): 1020.01,1020.01 1020.01,5479.98 3629.99,5479.98 3629.99,1020.01

## Keep-outs
Keep-Out Layer:
  lines w10: 1100,1900 1100,5500 3550,5500 3550,1900 3300,1900 3300,1050 1350,1050 1350,1900 1100,1900

## Text inside footprints (layer, text, board x,y; h text height)
JP1: Top Overlay "34" at 3565,5350 h50; Top Overlay "33" at 3565,5250 h50; Top Overlay "1" at 1025,5250 h50; Top Overlay "2" at 1025,5350 h50